# Altium PCB PCB_TronicPros.PcbDoc
Units mm, origin at the board's own origin, x right, y up, seen from the top; angles counter-clockwise.
Board outline 71.75 x 49.28 mm, 2 copper layers (Top Layer, Bottom Layer); 24 components, 21 nets, 99 pads, 2 vias.
Unrouted connection lines stored in the file: 36.
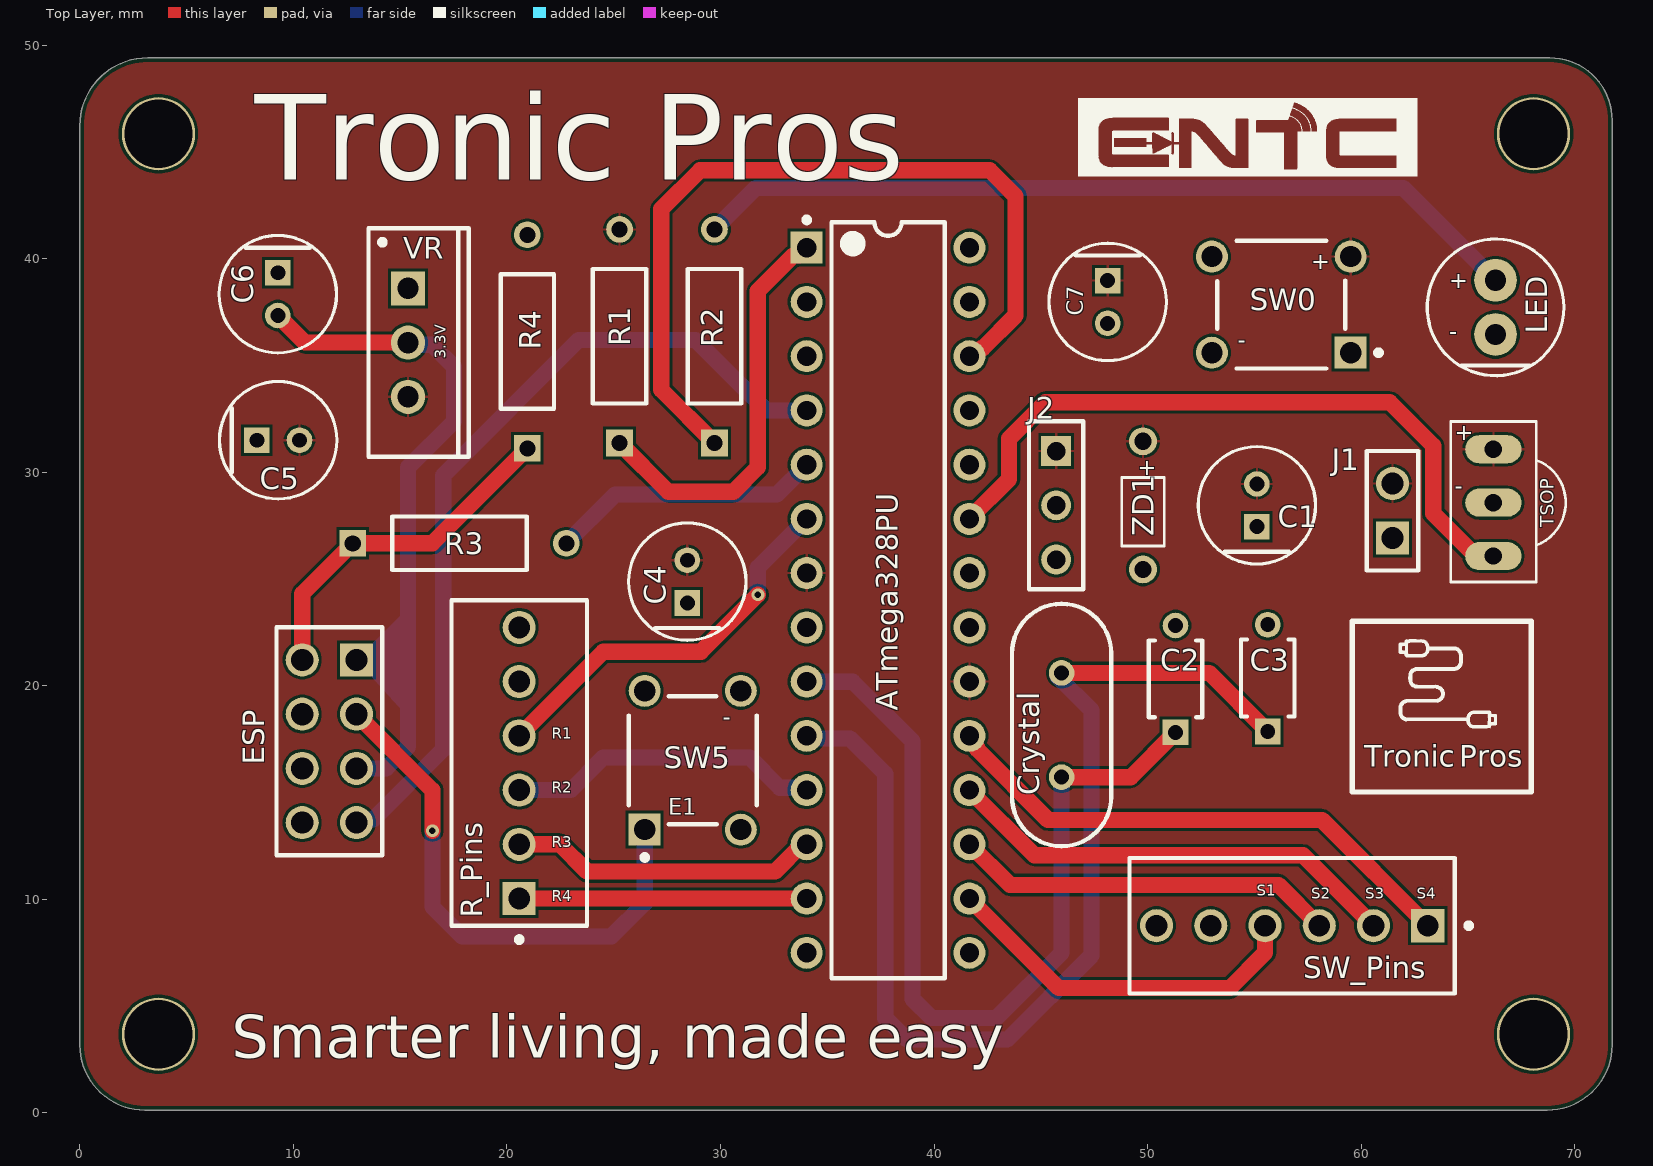
[diagram p0: Top Layer view]
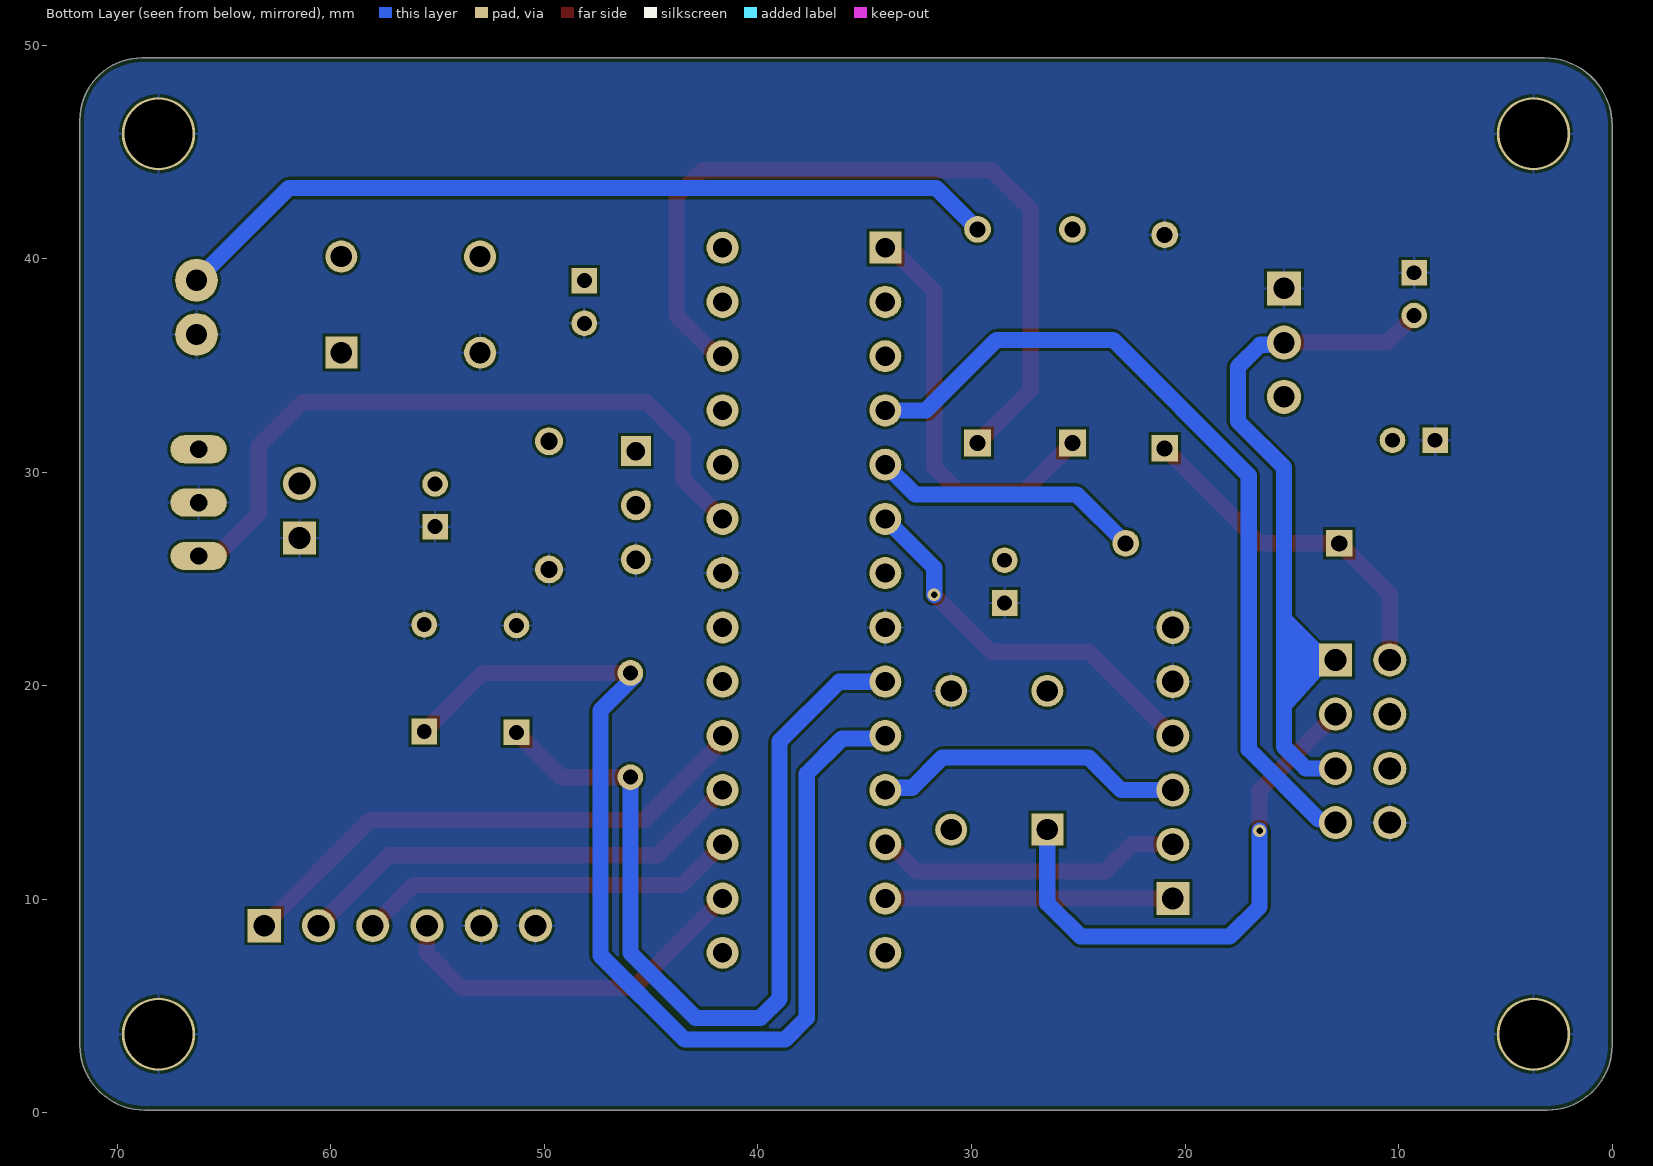
[diagram p1: Bottom Layer view, seen from below]
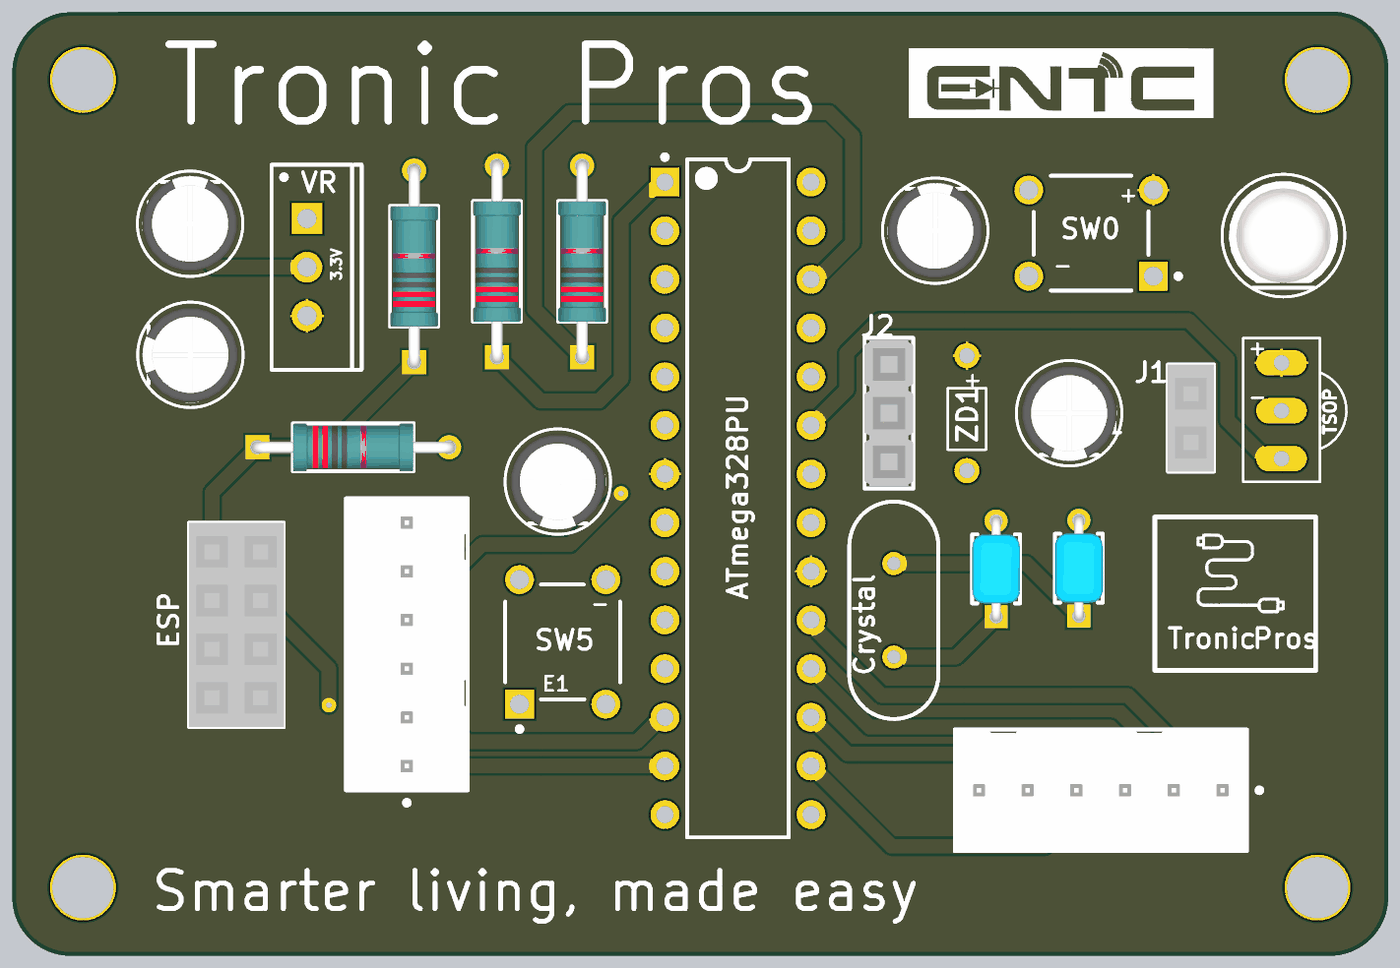
[diagram p2: 3D render of the assembled board from above, using the file's embedded part models]

## Layer stack, top to bottom
Top Solder: solder mask 0.0102, Solder Resist, Dk 3.5
Top Layer: signal copper 0.0356
Dielectric 1: dielectric 0.32, FR-4, Dk 4.8
Bottom Layer: signal copper 0.0356
Bottom Solder: solder mask 0.0102, Solder Resist, Dk 3.5

## Board outline
0,46.228 0,3.175 ccw(c3.048,3.175) 3.048,0.127 68.707,0.127 ccw(c68.707,3.175) 71.755,3.175 71.755,46.482 ccw(c68.834,46.482) 68.834,49.403 3.175,49.403 ccw(c3.175,46.228)

## Design rules (kind name [scope] priority, off if disabled: settings)
BoardOutlineClearance [All] p1: gap=0.2 ignorepadtopadclearanceinfootprint=FALSE
Clearance [All] p1: gap=0.127 ignorepadtopadclearanceinfootprint=FALSE except(0.25: Arc-Hole Track-Hole SMDPad-Hole THPad-Hole Via-Hole Fill-Hole Poly-Hole Region-Hole Text-Hole)
ComponentClearance [All] p1: gap=0.127 collisioncheckmode=3 verticalgap=0.127 showdistances=TRUE
DiffPairsRouting [All] p1: maxlimit=0.254 minlimit=0.127 mostfreqgap=0.127 toplayer_minwidth=0.127 toplayer_maxwidth=25.4 toplayer_prefwidth=0.127 bottomlayer_minwidth=0.127 bottomlayer_maxwidth=25.4 bottomlayer_prefwidth=0.127 maxuncoupledlength=12.7
Height [All] p1: minheight=0 maxheight=1816.048 prefheight=12.7
HoleSize [All] p1: absolutevalues=TRUE maxlimit=6.3 minlimit=0.3 maxpercent=80.000 minpercent=20.000
HoleToHoleClearance [All] p1: gap=0.25 allowstackedmicrovias=FALSE
MinimumAnnularRing [All] p1: minimumring=0.076
MinimumSolderMaskSliver [All] p1: minsoldermaskwidth=0
PlaneClearance [All] p1: clearance=0.127
PlaneConnect PlaneConnectPowerPads [InPadClass('PowerPads')] p1: planeconnectstyle=Direct reliefexpansion=0.508 reliefentries=4 reliefconductorwidth=0.254 reliefairgap=0.254
PlaneConnect [All] p2: pad.planeconnectstyle=Relief pad.reliefexpansion=0.3 pad.reliefentries=4 pad.reliefconductorwidth=0.127 pad.reliefairgap=0.127 via.planeconnectstyle=Direct via.reliefexpansion=0.3 via.reliefentries=4 via.reliefconductorwidth=0.127 via.reliefairgap=0.127
PolygonConnect PolygonConnectPowerPads [All vs (InPadClass('PowerPads'))] p1: connectstyle=Direct reliefconductorwidth=0.254 reliefentries=4 polygonreliefangle="90 Angle" airgapwidth=0.254
PolygonConnect [All] p2: thpad.connectstyle=Relief thpad.reliefconductorwidth=0.127 thpad.reliefentries=4 thpad.polygonreliefangle="90 Angle" thpad.airgapwidth=0.127 smdpad.connectstyle=Relief smdpad.reliefconductorwidth=0.127 smdpad.reliefentries=4 smdpad.polygonreliefangle="90 Angle" smdpad.airgapwidth=0.127 via.connectstyle=Direct via.reliefconductorwidth=0.127 via.reliefentries=4 via.polygonreliefangle="90 Angle" via.airgapwidth=0.127
RoutingVias [All] p1: holewidth=0.3 width=0.6 viastyle="Through Hole" minholewidth=0.3 minwidth=0.6 maxholewidth=0.6 maxwidth=6.6
SilkToSilkClearance [All] p1: silktosilkclearance=0
SilkToSolderMaskClearance [IsPad] p1: minsilkscreentomaskgap=0.127 clearancetoexposedcopper=TRUE
SolderMaskExpansion [All] p1: expansion=0.075 istentingtop=FALSE
Width [All] p1: maxlimit=1.016 minlimit=0.762 preferedwidth=0.762
20 further rules are at their usual default settings.

## Components (designator, comment, footprint, x,y, rotation, side; value= is the part's Value field where it differs from the comment)
ATmega328PU "ATmega328-PU" 28P3 37.846,24.003 r0 top
C1 "ECA1HHG100I" FP-RAD-TH-D_5_0_5-L_11_1-MFG 55.118,28.448 r90 top
C2 "RCE5C1H101J0K1H03B" FP-RCE0K1-MFG 51.308,20.32 r90 top
C3 "RCE5C1H101J0K1H03B" FP-RCE0K1-MFG 55.626,20.36 r90 top
C4 "ECA1HHG100I" FP-RAD-TH-D_5_0_5-L_11_1-MFG 28.448,24.876 r90 top
C5 "ECA1HHG100I" FP-RAD-TH-D_5_0_5-L_11_1-MFG 9.287,31.496 r0 top
C6 "ECA1HHG100I" FP-RAD-TH-D_5_0_5-L_11_1-MFG 9.271,38.338 r270 top
C7 "ECA1HHG100I" FP-RAD-TH-D_5_0_5-L_11_1-MFG 48.133,37.973 r270 top
Crystal "FOXSLF/120-20" FOX-FOXSLF-2_V 45.974,18.161 r90 top
ESP "SSW-104-02-G-D" SMTC-SSW-104-02-X-D 12.954,21.209 r270 top
J1 "SSW-102-02-T-S" SMTC-SSW-102-02-X-S 61.468,26.924 r90 top
J2 "SLW-103-01-T-S" SMTC-SLW-103-01-X-S 45.72,30.988 r270 top
LED "SFH 4550" FP-SFH_4550-MFG 66.294,37.719 r90 top
R1 "MBB02070C1002FCT00" FP-MBB0207-MFG 25.273,36.369 r90 top
R2 "MBB02070C1002FCT00" FP-MBB0207-MFG 29.718,36.369 r90 top
R3 "MBB02070C1002FCT00" FP-MBB0207-MFG 17.78,26.67 r0 top
R4 "MBB02070C1002FCT00" FP-MBB0207-MFG 20.955,36.115 r90 top
R_Pins "22-23-2061" MOLX-22-23-2061_V 20.574,16.383 r90 top
SW0 "1825910-6" TECO-1825910-6_V 56.261,37.846 r180 top
SW5 "1825910-6" TECO-1825910-6_V 28.702,16.51 r90 top
SW_Pins "22-23-2061" MOLX-22-23-2061_V 56.769,8.763 r180 top
TSOP "TSOP1838" TSOP18XX 66.167,28.575 r90 top
VR "LM1117T-3.3" T03B 15.367,36.068 r270 top
ZD1 "DIP-DIODE-ZENER-3.6V-500MW(DO-35)" DO-35 49.784,28.448 r90 top

## Footprints (in the part's own frame and the unit in brackets; to place one, negate y for a bottom-side part, rotate by r counter-clockwise, add the part's x,y. Pads: shape width x height; smd on the part's side, far side on the other; paste and mask are expansions set on the pad)
28P3 [mm] "28-Pin Plastic Dual In-Line Package (PDIP)"
  rect 1.5x1.5 hole 0.9: 1(-3.81,16.51)
  round 1.5 hole 0.9: 2(-3.81,13.97) 3(-3.81,11.43) 4(-3.81,8.89) 5(-3.81,6.35) 6(-3.81,3.81) 7(-3.81,1.27) 8(-3.81,-1.27) 9(-3.81,-3.81) 10(-3.81,-6.35) 11(-3.81,-8.89) 12(-3.81,-11.43) 13(-3.81,-13.97) 14(-3.81,-16.51) 15(3.81,-16.51) 16(3.81,-13.97) 17(3.81,-11.43) 18(3.81,-8.89) 19(3.81,-6.35) 20(3.81,-3.81) 21(3.81,-1.27) 22(3.81,1.27) 23(3.81,3.81) 24(3.81,6.35) 25(3.81,8.89) 26(3.81,11.43) 27(3.81,13.97) 28(3.81,16.51)
  silkscreen extent -3.93,-17.7 2.65,17.93, body extent -3.6,-17.65 3.6,17.65, height 4.58
DO-35 [mm]
  round 1.308 hole 0.8: A(-3,0) C(3,0)
  silkscreen extent -1.9,-1 1.3,1
FOX-FOXSLF-2_V [mm] "THD, 2-Leads, Body 11.35x4.65mm, Pitch 4.88mm"
  round 1.2 hole 0.7: 1(-2.44,0) 2(2.44,0)
  silkscreen extent -5.68,-2.33 5.68,2.33, body extent -5.67,-2.32 5.68,2.32, height 3.6
FP-MBB0207-MFG [mm]
  rect 1.25x1.25 hole 0.75 paste-1000 mask+0: 1(-5,0)
  round 1.25 hole 0.75 paste-1000 mask+0: 2(5,0)
  silkscreen extent -3.15,-1.25 3.15,1.25, body extent -5.72,-1.35 5.72,1.35, height 0.25
FP-RAD-TH-D_5_0_5-L_11_1-MFG [mm]
  rect 1.2x1.2 hole 0.7 paste-1000 mask+0: 1(-1,0)
  round 1.2 hole 0.7 paste-1000 mask+0: 2(1,0)
  silkscreen extent -2.75,-2.75 2.75,2.75, body extent -2.85,-2.85 2.85,2.85, height 0.25
FP-RCE0K1-MFG [mm]
  rect 1.2x1.2 hole 0.7 paste-1000 mask+0: 1(-2.5,0)
  round 1.2 hole 0.7 paste-1000 mask+0: 2(2.5,0)
  silkscreen extent -1.8,-1.25 1.8,1.25, body extent -3.2,-1.35 3.2,1.35, height 0.25
FP-SFH_4550-MFG [mm]
  round 2 hole 1 paste-1000 mask+0: 1(-1.27,0) 2(1.27,0)
  silkscreen extent -3.2,-3.2 3.2,3.2, body extent -3.05,-3.05 3.05,3.05, height 0.25
MOLX-22-23-2061_V [mm] "THD, 6-Leads, Body 15.24x6.35mm, Pitch 2.54mm"
  rect 1.55x1.55 hole 1.02: 1(-6.35,0)
  round 1.55 hole 1.02: 2(-3.81,0) 3(-1.27,0) 4(1.27,0) 5(3.81,0) 6(6.35,0)
  silkscreen extent -8.39,-3.18 7.62,3.18, body extent -7.54,-3.25 7.54,3.1, height 10.67
SMTC-SLW-103-01-X-S [mm] "Low Profile Socket Strip, 1x3 Pins, Vertical, 2.54mm Pitch, Female"
  rect 1.4x1.4 hole 0.86: 1(0,0)
  round 1.4 hole 0.86: 2(2.54,0) 3(5.08,0)
  silkscreen extent -1.4,-1.27 6.48,1.27, body extent -1.27,-1.27 6.35,1.27, height 4.57
SMTC-SSW-102-02-X-S [mm] "SQ Post Socket, 1x2 Pins, Vertical, 2.54mm Pitch, Female"
  rect 1.55x1.55 hole 1.04: 1(0,0)
  round 1.55 hole 1.04: 2(2.54,0)
  silkscreen extent -1.53,-1.2 4.07,1.2, body extent -1.52,-1.21 4.06,1.21, height 8.51
SMTC-SSW-104-02-X-D [mm] "SQ Post Socket, 2x4 Pins, Vertical, 2.54mm Pitch, Female"
  rect 1.55x1.55 hole 1.04: 1(0,0)
  round 1.55 hole 1.04: 2(0,-2.54) 3(2.54,0) 4(2.54,-2.54) 5(5.08,0) 6(5.08,-2.54) 7(7.62,0) 8(7.62,-2.54)
  silkscreen extent -1.53,-3.74 9.15,1.2, body extent -1.52,-3.75 9.14,1.21, height 8.51
T03B [mm] "TO, Thru-Hole, Vertical, Heatsink Mounted; 3 In-Line Leads; Pitch 2.54 mm"
  rect 1.6x1.6 hole 1: 1(-2.54,0)
  round 1.6 hole 1: 2(0,0) 3(2.54,0)
  silkscreen extent -5.35,-1.85 5.35,2.85, body extent -5.4,-1.9 5.4,2.9, height 19.8
TECO-1825910-6_V [mm] "Switch, 4-Leads, Body 5.99x5.99mm"
  rect 1.5x1.5 hole 0.99: 1(-3.25,2.25)
  round 1.5 hole 0.99: 2(3.25,2.25) 3(-3.25,-2.25) 4(3.25,-2.25)
  silkscreen extent -4.68,-3 3,3, body extent -3,-2.99 2.99,3, height 5
TSOP18XX [mil]
  oval 52x104 hole 32: GND(-0.05,-1.05) OUT(-98.47,-1.05) VCC(98.38,-1.05)
  silkscreen extent -146,-134 149,78

## Part data
ATmega328PU: library part CMP-0095-00015-2, "8-bit AVR Microcontroller, 32KB Flash, 1KB EEPROM, 2KB SRAM, 28-pin PDIP, Industrial Grade (-40°C to 85°C)", ComponentLink1Description="Manufacturer URL", ComponentLink1URL=http://www.atmel.com/, ComponentLink2Description="ATmega48A/48PA/88A/88PA/168A/168PA/328/328P Datasheet", ComponentLink2URL=http://www.atmel.com/dyn/resources/prod_documents/8271.pdf, ComponentLink3Description="ATmega48A/48PA/88A/88PA/168A/168PA/328/328P Summary", ComponentLink3URL=http://www.atmel.com/dyn/resources/prod_documents/8271S.pdf, DatasheetVersion="revD, May-2011", PackageDescription="28-lead (0.300\"/7.62mm Wide) Plastic Dual Inline Package (PDIP)", PackageReference=28P3, PackageVersion="revB, Sep-2001", RevisionNote="DatasheetVersion updated. URLs added."
C1 C4 C5 C6 C7: library part CMP-05427-000260-1, "Aluminum Electrolytic Capacitors (Radial Lead Type) AEC-Q200 Qualified 10uF ±20% 50V", Capacitance=10uF, Case/Package=Radial, Leakage Current=3uA, Max Operating Temperature=105°C, Min Operating Temperature=-55°C, Package Quantity=2000, Ripple Current=39mA, Tolerance=20%, Voltage Rating=50V, Construction=RADIAL, Contact Plating=Tin, Diameter=5mm, Height=11mm, Height - Seated (Max)=0.472inch, Lead Diameter=0.5mm, Lead Free="Lead Free", Lead Pitch=2.5mm, Lead/Base Style=Straight, Length=11mm, Life (Hours)=1000Hour, Mount="Through Hole", Packaging="Ammo Pack", Polarity=Polar, Radiation Hardening=No, RoHS Compliant=Yes, Series=NHG, Termination=Radial, Voltage Rating (DC)=50V
C2 C3: library part CMP-06035-040252-1, "Cap Ceramic 100pF 50V C0G ±5% Radial 5mm +125°C Automotive Bulk", Capacitance=100pF, Case/Package=Radial, Dielectric=C0G, Max Operating Temperature=125°C, Min Operating Temperature=-55°C, Package Quantity=500, Ratings=AEC-Q200, Resistor Type=Ceramic, Tolerance=5%, Voltage Rating=50V, Height=3.5mm, Height - Seated (Max)=0.138inch, Lead Diameter=0.5mm, Lead Pitch=0.197inch, Lead/Base Style="Formed Leads", Length=0.142inch, Mount="Through Hole", Packaging=Bulk, Termination=Radial, Voltage Rating (DC)=50V, Width=2.5mm
Crystal: library part CMP-1749-00004-1, "Resistance Weld Thru-Hole Crystal, 12 MHz, +/-30 ppm, -20 to 70 degC, 2-Pin THD, RoHS, Bulk", Case\Package=TO-251-3, Input Capacitance="350 pF", Max Operating Temperature="150 degC", Max Power Dissipation="2.5 W", Min Operating Temperature="-55 degC", Package Quantity=70, ComponentLink1Description="Manufacturer URL", ComponentLink1URL=http://www.foxonline.com/, ComponentLink2Description=Datasheet, ComponentLink2URL=http://www.foxonline.com/pdfs/hc49slf.pdf, DatasheetVersion=Mar-15, Elements=1, Height="6.1 mm", Length="6.6 mm", Mount="Through Hole", PackageDescription="2-Pin Through Hole Device, Body 11.35 x 4.65 mm, Pitch 4.88 mm", PackageReference=FOXSLF-2, Packaging=Rail/Tube, Pins=3, Radiation Hardening=No, Rds On Max="115 mohm", REACH SVHC="No SVHC", RoHSCompliant=true, Typical Rise Time="90 ns", Width="2.3 mm"
ESP: library part CMP-1023-00343-1, "SQ Post Socket, Through-hole, Vertical, -55 to 125 degC, 2.54mm Pitch, 8-Pin, Female, RoHS", Manufacturer=Samtec, Temperature Range="-55 to 125 degC", ComponentLink1Description="Manufacturer URL", ComponentLink1URL=http://www.samtec.com, ComponentLink2Description=Datasheet, ComponentLink2URL=http://www.samtec.com/documents/webfiles/pdf/SSW_TH.PDF, ComponentLink3Description="Package Specification", ComponentLink3URL=http://www.samtec.com/documents/webfiles/cpdf/SSW-1XX-XX-XXX-X-XX-XXX-XX-MKT.pdf, DatasheetVersion=F-214, Mounting Technology=Through-hole, Orientation=Vertical, PackageDescription="Assembly, Socket Strip .016 X .031 Tail", PackageReference=SSW-104-02-X-D, PackageVersion="CA, 6/1987", PartNumber=SSW-104-02-G-D, Pitch="2.54 mm", RoHS=True
J1: library part CMP-1023-00323-1, "SQ Post Socket, Through-hole, Vertical, -55 to 105 degC, 2.54 mm Pitch, 2-Pin, Female, RoHS", Manufacturer=Samtec, Temperature Range="-55 to 105 degC", ComponentLink1Description="Manufacturer URL", ComponentLink1URL=http://www.samtec.com, ComponentLink2Description=Datasheet, ComponentLink2URL=http://www.samtec.com/documents/webfiles/pdf/SSW_TH.PDF, ComponentLink3Description="Package Specification", ComponentLink3URL=http://www.samtec.com/documents/webfiles/cpdf/SSW-1XX-XX-XXX-X-XX-XXX-XX-MKT.pdf, DatasheetVersion=F-214, Mounting Technology=Through-hole, Orientation=Vertical, PackageDescription="Assembly, Socket Strip .016 X .031 Tail", PackageReference=SSW-102-02-X-S, PackageVersion="CA, 6/1987", PartNumber=SSW-102-02-T-S, Pitch="2.54 mm", RoHS=True
J2: library part CMP-1023-00129-1, "Low Profile Socket Strips, Through-hole, Vertical, -55 to 105 degC, 2.54 mm Pitch, 3-Pin, Female, RoHS", Manufacturer=Samtec, Temperature Range="-55 to 105 degC", ComponentLink1Description="Manufacturer URL", ComponentLink1URL=http://www.samtec.com, ComponentLink2Description=Datasheet, ComponentLink2URL=http://www.samtec.com/documents/webfiles/pdf/SLW.PDF, ComponentLink3Description="Package Specification", ComponentLink3URL=http://www.samtec.com/documents/webfiles/cpdf/SLW-1XX-01-X-X-MKT.pdf, DatasheetVersion=F-214, Mounting Technology=Through-hole, Orientation=Vertical, PackageDescription="Low Profile Socket Strip", PackageReference=SLW-103-01-X-S, PackageVersion="X, 9/1987", PartNumber=SLW-103-01-T-S, Pitch="2.54 mm", RoHS=True
LED: library part CMP-62016-000011-1, "EMITTER IR 860NM 100MA RADIAL", Colour=Infrared, Forward Current=100mA, Forward Voltage=1.5V, Manufacturer="Osram Opto", Reverse Voltage=5V, Temperature="-40°C to +100°C", Temperature Range High=+100°C, Temperature Range Low=-40°C, Automotive=No, Category=Diode, ComponentLink2Description=Datasheet, ComponentLink2URL=https://dammedia.osram.info/media/resource/hires/osram-dam-5580407/SFH%204550_EN.pdf, Device Class L1=Optoelectronics, Device Class L2=LEDs, Device Class L3=unset, Digikey Description="EMITTER IR 860NM 100MA RADIAL", Lead Free=Yes, Led Orientation=Straight, Manufacturer Part Number="SFH 4550", Mouser Description="Infrared Emitters - High Power Infrared 850 nm HALF ANGLE +/-3DEG", Octopart=https://octopart.com/sfh+4550-osram+opto-55410894, Package="SFH 4550", Peak Emmision Wavelength=860nm, RoHS=TRUE, Viewing Angle=6°
R1 R2 R3 R4: library part CMP-02408-000035-1, "RES 10K OHM 0.6W 1% AXIAL", Case/Package=Conformal, Max Operating Temperature=155°C, Max Power Dissipation=600mW, Min Operating Temperature=-55°C, Resistance=10kR, Resistance Tolerance=1%, Resistor Type="Metal Film", Temperature Coefficient=50ppm/°C, Voltage Rating=300V, Construction=Cylindrical, Contact Plating=Tin, Diameter=2.5mm, Features="Automotive AEC-Q200", Lead Free="Lead Free", Length=6.5mm, Military Standard=Not, Number of Terminations=2, Packaging="Tape and Reel", Power Rating=600mW, Radiation Hardening=No, RoHS Compliant=Yes, Series="MBB 0207 - Professional", Technology="THIN FILM", Termination=Axial, Tolerance=1%, Voltage Rating (DC)=300V
R_Pins SW_Pins: library part CMP-2000-05536-1, "Male Header, Pitch 2.54 mm, 1 x 6 Position, Height 10.67 mm, Tail Length 3.56 mm, 0 to 70 degC, RoHS, Bulk", Current Rating=4A, Manufacturer=Molex, Package Description="Male Header, Pitch 2.54 mm, 1 x 6 Position, Height 10.67 mm, Tail Length 3.56 mm", Voltage Rating=250V, Brand=Molex, Contact Material=Brass, Contact Plating=Tin, Datasheet URL=https://datasheet.ciiva.com/19460/232303-19460895.pdf, Datasheet Version="Rev. P, 09/2001", Factory Pack Quantity=1000, Housing Material=Nylon, Manufacturer URL=http://www.molex.com/, Mounting Angle=Vertical, Mounting Style=ThroughHole, Mounting Technology=ThroughHole, Number of Positions=6, Number of Positions / Contacts=6, Number Of Rows=1, Package Reference=22-23-2061, Packaging=Bulk, Pitch=2.54mm, Product Category=.100K.K.Connectors, Product Type=Headers, RoHS=Details, Series=6373, Termination Style=ThroughHole, Tradename=KK, Type=PinStrip
SW0 SW5: library part CMP-1684-00021-1, "Tact Switch, SPST-NO, 0.05 A, -35 to 85 degC, 4-Pin THD, RoHS, Bulk", Actuator Color=Black, Contact Rating @ Voltage=0.05A@24VDC, Dielectric Strength=500VAC, Manufacturer="TE Connectivity", Maximum AC Voltage Rating=N/A, Maximum Contact Resistance=100mOhm, Maximum DC Voltage Rating=24V, Minimum Insulation Resistance=100MOhm, Operating Temperature=-35to85C, Package Description="4-Pin Through Hole Device, Body 5.99 x 5.99 mm, Pitch 6.5 mm", Package Reference=THD, Actuator Length=1.4mm, Actuator Material=PolybutyleneTerephthalate, Actuator Style=RoundButton, Base Material=N/A, Body Orientation=Straight, Bushing Type=Unthreaded, Contact Material=CopperAlloy, Contact Plating=Silver, Datasheet URL=http://www.te.com/commerce/DocumentDelivery/DDEController?Action=showdoc&DocId=Customer+Drawing%7F1825910%7FC9%7Fpdf%7FEnglish%7FENG_CD_1825910_C9.pdf%7F1825910-6, Datasheet Version="Rev. C9", Dimension=5.99x5mm, Electrical Life=100000Cycles, Family=1825910, Function=MomentaryContact, Housing Material=N/A, Illumination=N/R, Manufacturer URL=http://www.te.com, Mechanical Life=100000Cycles, Mounting=ThroughHole, Packaging=N/A, Part No=1825910-6, Pole Throw Configuration=SPST, Product Weight=N/A, RoHS=Yes, Seal Description=N/A, Seal Location=N/A, Switch Configuration=OFF(ON), Terminal Type=PCPins, Thread Size=N/R
TSOP: "IR Receiver and Demodulator", Package=None, Availability=Unavailable, MP=TSOP1838, Price=None
VR: library part CMP-0062-02490-2, "800mA Low-Dropout Linear Regulator, 3-pin TO-220", Manufacturer="National Semiconductor", PackageTopMarking=NSUZXYTTE#*LM1117T*3.3, PowerWise=N, ComponentLink1Description="LM1117 Datasheet", ComponentLink1URL=http://www.national.com/ds/LM/LM1117.pdf, ComponentLink2Description="LM1117 Web Page", ComponentLink2URL=http://www.national.com/pf/LM/LM1117.html, ComponentLink3Description="T03B Package Page", ComponentLink3URL=http://www.national.com/packaging/folders/t03b.html, CompType="LDO IC", DatasheetVersion=Apr-2006, PackageDescription="TO-220, Molded, 3 Lead, Straight", PackageReference=T03B, PackageVersion="revL, Jan-1992", PinCount=3, RevisionNote="Component URLs added", RoHS=N
ZD1: "Zener Diode 3.6V 500mW Â±5% Through Hole DO-35", Package="DO-35 MCC", Availability=Unavailable, MF="Micro Commercial", MP=1N5227B-TP, Price=None, SnapEDA_Link=https://www.snapeda.com/parts/1N5227B-TP/Micro%20Commercial/view-part/214543/?ref=snap

## Free pads (board coordinates)
  round 3.429 hole 3.2: 2(3.683,45.847) 3(3.683,3.683) 4(68.072,3.683) 5(68.072,45.847)

## Via types
v1: diameter 0.6, hole 0.3, Top Layer to Bottom Layer, 2 vias

## Nets (pads, with @x,y where several pads share a name; then routed paths per layer and width w, separated by ;. In a path a pad name is that pad's centre, name@x,y a point inside that pad or via, vN(x,y) a via of type N, cw(c..) or ccw(c..) an arc to the next point about the centre after c; other vN are vias at no path point)
3.3V: C6.2 ESP.1 ESP.5 VR.2 | length 33.1
  Top Layer w0.762: C6.2 10.541,36.068 VR.2
  Bottom Layer w0.762: ESP.5 14.351,16.129 15.367,17.145 15.367,21.209 15.367,30.226 17.526,32.385 17.526,34.925 16.487,35.964 15.471,35.964 VR.2 ; ESP.1 15.316,21.209
5V: ATmega328PU.7 ATmega328PU.20 C1.2 C4.2 C5.2 C7.1 J1.2 J2.1 R1.2 SW0.3 TSOP.VCC VR.3 ZD1.C | length 0
  Bottom Layer w0.762: J1.2@61.46,29.456 J1.2
9: ATmega328PU.9 C2.1 Crystal.1 | length 41.2
  Top Layer w0.762: Crystal.1 49.209,15.721 C2.1
  Bottom Layer w0.762: ATmega328PU.9 36.195,20.193 38.989,17.399 38.989,5.334 39.878,4.445 42.926,4.445 45.974,7.493 Crystal.1
10: ATmega328PU.10 C3.1 Crystal.2 | length 52.2
  Top Layer w0.762: Crystal.2 52.885,20.601 C3.1
  Bottom Layer w0.762: ATmega328PU.10@34.197,17.653 ATmega328PU.10 34.163,17.526 36.068,17.526 37.719,15.875 37.719,4.445 38.735,3.429 43.434,3.429 47.371,7.366 47.371,18.85 Crystal.2@45.797,20.424
23: ATmega328PU.23 TSOP.OUT | length 32.8
  Top Layer w0.762: ATmega328PU.23 43.51,29.667 43.51,31.572 45.212,33.274 61.341,33.274 63.373,31.242 63.373,28.067 65.087,26.353 65.103,26.353 65.382,26.074 TSOP.OUT
26: ATmega328PU.26 R2.1 | length 38.4
  Top Layer w0.762: R2.1 27.231,33.856 27.231,42.321 29.045,44.134 42.607,44.134 43.815,42.926 43.815,37.338 42.279,35.802 42.225,35.802 41.856,35.433 ATmega328PU.26
\: ATmega328PU.1 R1.1 | length 19.3
  Top Layer w0.762: R1.1 27.559,29.083 30.607,29.083 31.75,30.226 31.75,38.481 33.413,40.144 33.667,40.144 ATmega328PU.1
GND: ATmega328PU.8 ATmega328PU.22 C1.1 C2.2 C3.2 C4.1 C5.1 C6.1 C7.2 ESP.8 J1.1 J2.3 LED.1 pad.2 pad.3 pad.4 pad.5 R4.2 R_Pins.5 R_Pins.6 SW0.2 SW5.4 SW_Pins.5 SW_Pins.6 TSOP.GND VR.1 ZD1.A
NetESP_2: ESP.2 R3.1 R4.1 | length 16.5
  Top Layer w0.762: ESP.2 10.414,24.304 R3.1 16.51,26.67 R4.1
NetESP_3: ESP.3 SW5.1 | length 25.1
  Top Layer w0.762: ESP.3 16.51,15.113 v1(16.51,13.208)
  Bottom Layer w0.762: v1(16.51,13.208) 16.51,9.652 17.907,8.255 24.892,8.255 26.452,9.815 SW5.1
NetLED_2: LED.2 R2.2 | length 39.2
  Bottom Layer w0.762: R2.2 31.656,43.307 61.976,43.307 LED.2
R1: ATmega328PU.6 R_Pins.4 | length 18.4
  Top Layer w0.762: R_Pins.4 24.511,21.59 29.083,21.59 v1(31.75,24.257)
  Bottom Layer w0.762: v1(31.75,24.257) 31.75,25.527 ATmega328PU.6
R2: ATmega328PU.11 R_Pins.3 | length 14.7
  Bottom Layer w0.762: R_Pins.3 22.987,15.113 24.511,16.637 31.369,16.637 32.778,15.228 33.921,15.228 ATmega328PU.11
R3: ATmega328PU.12 R_Pins.2 | length 14.5
  Top Layer w0.762: R_Pins.2 22.479,12.573 23.749,11.303 32.566,11.303 33.836,12.573 ATmega328PU.12
R4: ATmega328PU.13 R_Pins.1 | length 13.5
  Top Layer w0.762: R_Pins.1 ATmega328PU.13
Rx: ATmega328PU.5 R3.2 | length 12.8
  Bottom Layer w0.762: R3.2 25.066,28.956 32.639,28.956 ATmega328PU.5
S1: ATmega328PU.16 SW_Pins.4 | length 17.5
  Top Layer w0.762: ATmega328PU.16 45.847,5.842 53.848,5.842 55.499,7.493 SW_Pins.4
S2: ATmega328PU.17 SW_Pins.3 | length 18
  Top Layer w0.762: ATmega328PU.17 43.561,10.668 56.134,10.668 SW_Pins.3
S3: ATmega328PU.18 SW_Pins.2 | length 21.6
  Top Layer w0.762: ATmega328PU.18 44.704,12.065 57.277,12.065 SW_Pins.2
S4: ATmega328PU.19 SW_Pins.1 | length 25.3
  Top Layer w0.762: ATmega328PU.19 41.656,17.453 42.025,17.084 42.025,17.03 45.339,13.716 58.166,13.716 SW_Pins.1
Tx: ATmega328PU.4 ESP.7 | length 39.5
  Top Layer w0.762: ESP.7 ESP.7@12.954,13.802
  Bottom Layer w0.762: ESP.7 13.105,13.74 13.74,13.74 17.018,17.018 17.018,29.845 23.368,36.195 28.829,36.195 32.131,32.893 ATmega328PU.4
pads on no net: ATmega328PU.2 ATmega328PU.3 ATmega328PU.14 ATmega328PU.15 ATmega328PU.21 ATmega328PU.24 ATmega328PU.25 ATmega328PU.27 ATmega328PU.28 ESP.4 ESP.6 J2.2 SW0.1 SW0.4 SW5.2 SW5.3

## Polygon pours and split planes (outlines as drawn)
GND on Bottom Layer "GND Polygon" (solid, pour order 4): 0,46.228 0,3.175 ccw(c3.048,3.175) 3.048,0.127 68.707,0.127 ccw(c68.707,3.175) 71.755,3.175 71.755,46.482 ccw(c68.834,46.482) 68.834,49.403 3.175,49.403 ccw(c3.175,46.228)
5V on Top Layer "5V Polygon" (solid, pour order 3): 0,46.228 0,3.175 ccw(c3.048,3.175) 3.048,0.127 68.707,0.127 ccw(c68.707,3.175) 71.755,3.175 71.755,46.482 ccw(c68.834,46.482) 68.834,49.403 3.175,49.403 ccw(c3.175,46.228)

## Other copper
Bottom Layer:
  region net 3.3V: 12.954,21.209 15.367,23.622 15.367,18.542

## Silkscreen, mask and mechanical layers (free items; w line width, h text height)
Top Overlay:
  drawing of 6 lines, arcs and shapes, not listed
  text "Tronic Pros" at 8.197,43.688 h4
  text "+" at 57.658,39.497 h0.76
  text "+" at 64.135,38.608 h0.76
  text "-" at 64.135,36.195 h0.76
  text "-" at 54.229,35.814 h0.76
  text "3.3V" at 17.145,35.306 h0.51 r90
  text "+" at 64.389,31.496 h0.76
  text "+" at 49.53,29.845 h0.76
  text "-" at 64.389,28.956 h0.76
  text "-" at 30.099,18.161 h0.76
  text "R1" at 22.098,17.526 h0.51
  text "Tronic" at 60.147,16.217 h1.02
  text "Pros" at 64.592,16.217 h1.02
  text "R2" at 22.098,14.986 h0.51
  text "E1" at 27.559,13.97 h0.76
  text "R3" at 22.098,12.446 h0.51
  text "S1" at 55.118,10.16 h0.51
  text "S2" at 57.658,10.033 h0.51
  text "S3" at 60.198,10.033 h0.51
  text "S4" at 62.611,10.033 h0.51
  text "R4" at 22.098,9.906 h0.51
  text "Smarter living, made easy" at 7.112,2.572 h2
Mechanical 13:
  lines w0.254: 0.127,3.048 ccw(c2.978,3.105) 3.035,0.254 68.834,0.254 ccw(c68.834,3.048) 71.628,3.048 71.618,46.577 ccw(c68.833,46.481) 68.736,49.266 3.162,49.276 ccw(c3.162,46.241) 0.127,46.241 0.127,3.048